# Altium PCB IPG_Rigid.PcbDoc (part 9 of 13)
Units mm, origin at the board's own origin, x right, y up, seen from the top; angles counter-clockwise.
Board outline 69.6 x 90.73 mm, 10 copper layers (TOP, DHOR, DVERT, GND 1, POWER, GND 2, GND 3, AVERT, AHOR, BOT), stack 1.198 mm thick; 745 components, 398 nets, 1997 pads, 2678 vias.
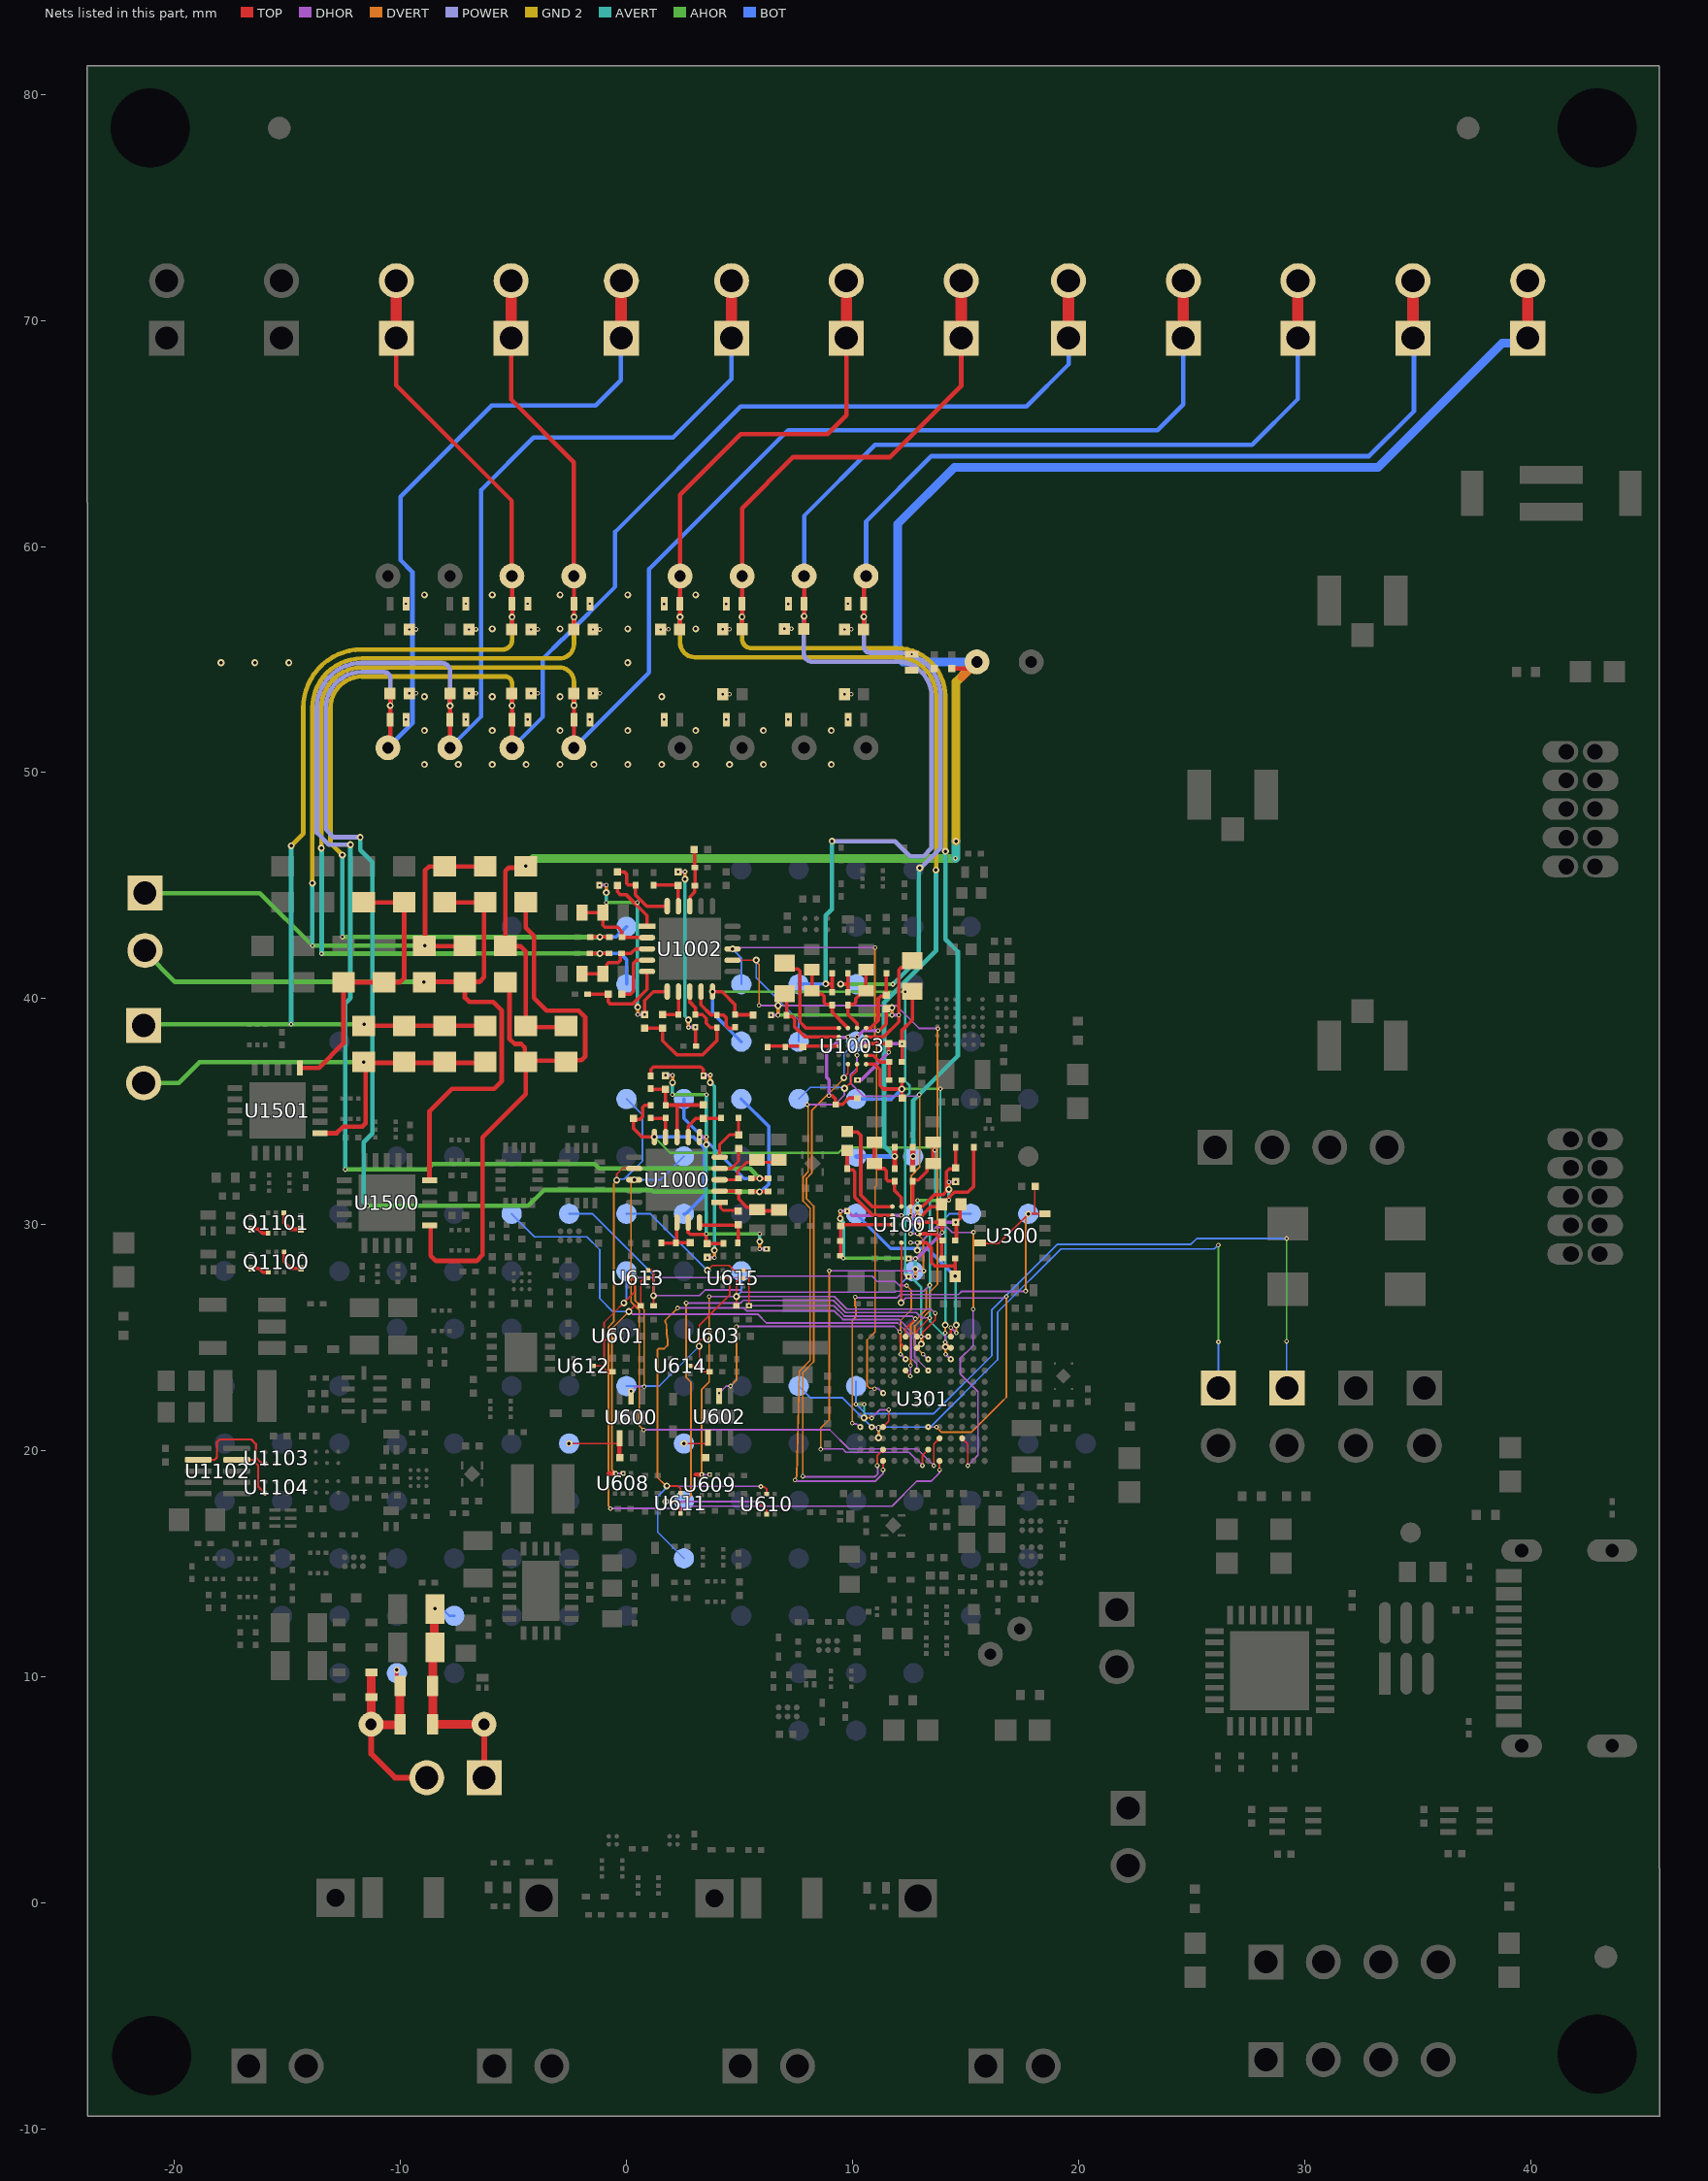
[diagram p13: the nets of this part, all layers, seen from the top]

## Via types
v1: diameter 0.203, hole 0.102, TOP to DHOR, tented top, 561 vias
v2: diameter 0.203, hole 0.102, DHOR to DVERT, tented top, 481 vias
v3: diameter 0.305/0.305/0.305/0.305/0.305/0.305 (per signal layer), hole 0.152, DVERT to AVERT, 397 vias
v4: diameter 0.305/0.305/0/0.305/0.305/0.305 (per signal layer), hole 0.152, DVERT to AVERT, tented top, 283 vias
v5: diameter 0.305/0.305/0.305/0.305/0/0.305/0.305/0.305/0.305/0.305 (per signal layer), hole 0.152, TOP to BOT, 259 vias
v6: diameter 0.305, hole 0.152, TOP to BOT, tented both sides, 169 vias
v7: diameter 0.305/0.305/0.305/0.305/0/0.305/0.305/0.305/0.305/0.305 (per signal layer), hole 0.152, TOP to BOT, tented both sides, 140 vias
v8: diameter 0.203, hole 0.102, AVERT to AHOR, tented top, 101 vias
v9: diameter 0.305/0.305/0.305/0.305/0.305/0.305 (per signal layer), hole 0.152, DVERT to AVERT, tented top, 79 vias
v10: diameter 0.305/0/0/0.305/0/0.305/0.305/0/0/0.305 (per signal layer), hole 0.152, TOP to BOT, tented both sides, 74 vias
v11: diameter 0.305/0.305/0.305/0.305/0.305/0.305/0.305/0.305/0.305/0.305 (per signal layer), hole 0.152, TOP to BOT, tented both sides, 66 vias
v12: diameter 0.203, hole 0.102, AHOR to BOT, tented both sides, 31 vias
v13: diameter 0.203, hole 0.102, DHOR to DVERT, tented both sides, 9 vias
v14: diameter 0.203/0.203 (per signal layer), hole 0.102, DHOR to DVERT, tented top, 7 vias
v15: diameter 0.203/0.203 (per signal layer), hole 0.102, TOP to DHOR, tented top, 7 vias
v16: diameter 0.203, hole 0.102, TOP to DHOR, tented both sides, 5 vias
v17: diameter 0.305, hole 0.152, DVERT to AVERT, tented both sides, 2 vias
v18: diameter 0.305/0.305/0/0.305/0.305/0.305 (per signal layer), hole 0.152, DVERT to AVERT, tented both sides, 2 vias
v19: diameter 0.305, hole 0.152, DVERT to AVERT, tented top, 2 vias
v20: diameter 0.305/0/0/0.305/0.305/0.305/0.305/0/0/0.305 (per signal layer), hole 0.152, TOP to BOT, tented both sides, 1 vias
v21: diameter 0.305/0.305/0/0.305/0.305/0.305 (per signal layer), hole 0.152, DVERT to AVERT, 1 vias
v22: diameter 0.203, hole 0.102, TOP to BOT, tented top, 1 vias

## Nets (pads, with @x,y where several pads share a name; then routed paths per layer and width w, separated by ;. In a path a pad name is that pad's centre, name@x,y a point inside that pad or via, vN(x,y) a via of type N, cw(c..) or ccw(c..) an arc to the next point about the centre after c; other vN are vias at no path point) (continued)
CH2_STIM_OR_SINK: C1511.2 C1512.2 C1513.2 C1520.2 U1501.6 | length 13
  TOP w0.2: U1501.6@-14.443,36.937 U1501.6@-14.402,36.937
  TOP w0.203: U1501.6@-14.402,36.937 -13.609,36.937 -12.522,38.024 C1513.2@-12.522,40.729 C1512.2@-10.731,40.729 -10.02,40.729 -9.836,40.913 C1520.2@-9.836,44.26 C1511.2@-11.627,44.26
CH3: C1204.2 C1508.1 C1509.1 C1510.1 C1519.1 D1205.2 J1206.1 J1226.1 J1226.2 JP1502.1 | length 58.8
  TOP w0.19: J1226.1@-10.185,69.222 -10.185,67.132 -5.072,62.018 J1206.1@-5.072,58.697 ; C1204.2@-5.064,56.336 J1206.1@-5.064,58.645
  TOP w0.203: C1508.1@-11.627,38.798 C1519.1@-6.254,38.798
  TOP w0.5: J1226.1@-10.185,69.222 J1226.2@-10.185,71.762
  GND 2 w0.2: v4(-14.834,46.761) -14.834,46.77 -14.3,47.304 -14.3,52.87 cw(c-11.721,52.87) -14.25,53.373 cw(c-11.721,52.87) -11.721,55.449 -5.474,55.449 ccw(c-5.474,55.859) -5.064,55.859 -5.064,56.336 v6(-5.064,56.886)
  AVERT w0.2: v8(-14.837,38.863) -14.837,46.74 v4@-14.824,46.752
  AHOR w0.2: JP1502.1@-21.361,38.811 -21.309,38.863 v8(-14.837,38.863) ; v8@-14.834,38.862 v7(-11.608,38.862)
CH3_STIM_OR_SINK: C1508.2 C1509.2 C1510.2 C1519.2 JP1502.2 U1501.1 | length 20.4
  TOP w0.203: U1501.1@-13.558,34.052 -12.822,34.052 -12.535,34.339 -11.683,34.339 -11.542,34.481 -11.542,37.113 C1508.2@-11.627,37.198 ; C1508.2@-11.589,37.16 -9.836,37.16 -8.045,37.16 -6.292,37.16 C1519.2@-6.254,37.198
  AHOR w0.2: JP1502.2@-21.361,36.271 -19.812,36.271 -18.893,37.19 v7(-11.629,37.19)
CH4: C1211.2 C1504.1 C1505.1 C1507.1 C1518.1 D1213.2 J1214.1 J1230.1 J1230.2 JP1501.1 | length 62.7
  TOP w0.19: J1230.1@-5.105,69.222 -5.105,66.512 -2.329,63.735 J1214.1@-2.329,58.697 ; C1211.2@-2.321,56.339 v6(-2.321,56.889) J1214.1@-2.321,58.645
  TOP w0.203: C1518.1@-7.149,42.329 C1505.1@-8.94,42.329 -8.915,42.354 -8.915,45.669 -8.738,45.847 -6.267,45.847 C1507.1@-6.254,45.86
  TOP w0.5: J1230.1@-5.105,69.222 J1230.2@-5.105,71.762
  GND 2 w0.2: v4@-13.9,45.11 -13.9,52.856 cw(c-11.707,52.856) -11.707,55.049 -2.971,55.049 ccw(c-2.971,55.699) -2.321,55.699 v6(-2.321,56.889)
  AVERT w0.2: v4(-13.898,45.112) -13.898,42.347 v8(-13.894,42.342)
  AHOR w0.2: JP1501.1@-21.307,44.671 -16.223,44.671 v8(-13.894,42.342) v7(-8.928,42.342)
CH4_STIM_OR_SINK: C1504.2 C1505.2 C1507.2 C1518.2 JP1501.2 U1500.15 | length 33.2
  TOP w0.203: C1505.2@-8.941,40.742 -6.502,40.742 -6.299,40.945 -6.299,44.214 C1507.2@-6.254,44.26 C1504.2@-8.045,44.26 ; C1505.2@-8.94,40.729 C1505.2@-8.94,40.741 ; U1500.15@-8.715,31.963 -8.715,35.024 -7.722,36.017 -5.86,36.017 -5.519,36.358 -5.519,39.468 -5.902,39.851 -6.958,39.851 -7.149,40.042 C1518.2@-7.149,40.729
  AHOR w0.2: JP1501.2@-21.296,42.066 -19.974,40.744 v7(-8.971,40.744)
CHG1.EN: R603.1 TP602.1 U301.J7 U608.2 U613.5 | length 32.8
  TOP w0.076: U608.2@-0.153,19 v1(-0.14,19) ; v7@0.102,26.162 0.356,26.416 R603.1@0.634,26.416 0.634,27.482 0.787,27.635 U613.5@0.958,27.635
  DVERT w0.076: v2(-0.47,18.999) -0.645,19.175 -0.645,25.41 -0.368,25.687 v7(0.104,26.159)
  DHOR w0.076: v2(-0.47,18.999) v1(-0.14,19) ; v7(0.104,26.159) 0.152,26.159 0.277,26.034 5.818,26.034 6.198,25.654 9.6,25.654 11.999,25.654 12.598,25.055 12.598,24.086 12.85,23.834 v1(12.85,23.55)
  BOT w0.076: TP602.1@-5.08,30.48 -4.066,29.466 -1.754,29.466 -1.184,28.895 -1.184,26.736 -0.607,26.159 v7(0.104,26.159)
CHG1.OVP_ERRn: R603.2 TP606.1 U301.J8 U613.6 | length 24.7
  TOP w0.076: U613.6@0.958,27.985 0.964,27.991 1.118,27.991 1.194,27.914 R603.2@1.194,26.416 ; U301.J8@12.35,23.55 12.35,23.508 v1(12.558,23.3)
  DVERT w0.076: v2(12.573,23.774) 12.573,25.559 12.814,25.8 13.271,26.257 13.271,27.164 13.416,27.308 v2(13.416,27.324)
  DHOR w0.076: v7(1.197,26.863) 3.234,26.863 3.483,27.112 5.03,27.112 5.124,27.018 11.875,27.018 11.92,27.064 13.155,27.064 v2(13.416,27.324) ; v1(12.558,23.3) 12.565,23.308 12.565,23.767 v2(12.573,23.774)
  BOT w0.076: TP606.1@-2.54,30.48 -1.499,30.48 1.197,27.784 v7(1.197,26.863)
CHG1.STATUS: U301.K8 U600.2 | length 21.5
  TOP w0.076: U301.K8@12.35,24.05 12.35,24.054 v1(12.352,24.057) U301.K8@12.355,24.059
  DVERT w0.076: v2@0.386,27.636 0.386,26.629 0.783,26.233 v2(0.783,22.836) ; v2@0.389,27.636 v2(0.414,27.661) ; v2(12.126,24.273) 12.126,25.758 12.598,26.231 12.598,27.102 v2(12.395,27.305)
  DHOR w0.076: v1(0.2,22.631) 0.404,22.836 v2(0.783,22.836) ; v2(0.414,27.661) 5.629,27.661 5.695,27.726 10.864,27.726 11.097,27.494 11.89,27.494 12.079,27.305 v2(12.395,27.305) ; v2@12.128,24.271 12.133,24.271 12.346,24.058 v1@12.352,24.058
CHG1_OVP_ERR: R601.2 TP607.1 U601.A1 U612.5 U613.2 | length 7.6
  TOP w0.076: U612.5@-1.455,23.749 -0.991,23.749 ; R601.2@-0.61,23.495 -0.838,23.495 -0.991,23.647 -0.991,23.749 ; U601.A1@-0.552,24.912 -0.564,24.9 -0.991,24.9 ; U613.2@0.058,27.635 0.229,27.635 0.356,27.508 0.356,27.021 -0.991,25.675 -0.991,24.9 ; -0.991,23.749 -0.991,24.9
  BOT w0.076: v7(-0.118,26.542) -0.118,26.583 0,26.701 TP607.1@0,27.94
CHG1_VCC: C600.1 TP600.1 U600.4 U608.3 | length 3.5
  TOP w0.076: v7(-2.54,20.32) -0.387,20.32 -0.315,20.392 -0.3,20.407 U600.4@-0.3,20.55
  TOP w0.203: -0.774,19 U608.3@-0.503,19 ; C600.1@-0.315,19.7 -0.315,20.392 U600.4@-0.315,20.55
CHG2.EN: R616.1 TP623.1 U301.L7 U609.2 U615.5 | length 23.2
  TOP w0.076: R616.1@4.861,26.408 4.861,27.474 5.014,27.627 U615.5@5.184,27.627 ; U301.L7@12.85,24.55 13.101,24.801 13.101,25.242 13.659,25.8 v1(13.659,26.086)
  DVERT w0.076: v2(3.327,18.948) 3.327,22.714 3.658,23.045 v2(3.658,26.822)
  DHOR w0.076: v2(3.327,18.948) 3.331,18.945 3.679,18.945 v1(3.683,18.941) ; v2(3.658,26.822) v2(3.658,26.822) 4.862,26.823 v7(4.863,26.824) 9.201,26.824 9.761,26.264 13.481,26.264 v1(13.659,26.086)
  BOT w0.076: v7(4.863,26.824) 5.08,27.041 TP623.1@5.08,27.94
CHG2.OVP_ERRn: R616.2 TP626.1 U301.M8 U615.6 | length 16.7
  TOP w0.076: v7(3.581,27.984) 3.797,28.2 4.529,28.2 4.745,27.984 U615.6@5.163,27.984 ; U615.6@5.19,27.983 5.344,27.983 5.421,27.906 R616.2@5.421,26.416 ; U301.M8@12.35,25.05 12.35,25.407 v1(12.785,25.842)
  DHOR w0.076: v1(5.42,26.412) 5.424,26.416 9.178,26.416 9.635,25.959 12.634,25.959 12.751,25.842 v1(12.785,25.842)
  BOT w0.076: TP626.1@0,30.48 1.068,30.48 3.564,27.984 v7(3.581,27.984)
CHG2.STATUS: U301.L8 U602.2 | length 11.5
  TOP w0.076: v1(12.092,25.256) 12.099,25.249 12.099,24.801 U301.L8@12.35,24.55
  DVERT w0.076: v2(4.6,22.861) 4.867,23.128 v2(4.867,25.491)
  DHOR w0.076: v1(4.1,22.552) 4.408,22.861 v2(4.6,22.861) ; v2(4.867,25.491) 4.877,25.502 11.847,25.502 v1(12.092,25.256)
CHG2_OVP_ERR: R612.2 TP627.1 U603.A1 U614.5 U615.2 | length 10.1
  TOP w0.076: U614.5@2.812,23.749 3.226,23.749 ; v7(3.216,24.622) 3.226,24.631 3.226,24.888 ; v7@3.226,24.655 3.226,23.749 ; U603.A1@3.681,24.912 3.251,24.912 3.226,24.888 ; R612.2@3.682,23.495 3.678,23.499 3.382,23.499 3.226,23.655 3.226,23.749 ; 4.363,27.634 4.497,27.634 4.566,27.565 4.566,26.892 3.226,25.552 3.226,24.888
  BOT w0.076: TP627.1@0,22.86 1.455,22.86 v7(3.216,24.622)
CHG2_VCC: C603.1 TP618.1 U602.4 U609.3 | length 1.6
  TOP w0.076: v7(2.54,20.32) U602.4@3.599,20.32 ; U602.4@3.599,20.357 3.599,20.465 3.6,20.466 U602.4@3.6,20.575
  TOP w0.203: 3.062,18.941 U609.3@3.333,18.941
  BOT w0.076: v7(2.54,20.32) TP618.1@2.565,20.345
CHG_RATE1: TP629.1 U301.J6 U610.5 U611.5 | length 30.8
  TOP w0.076: v7(1.785,18.442) 2.259,18.442 2.388,18.313 U611.5@2.388,18.128 ; v1(5.944,18.415) 5.948,18.41 6.092,18.41 6.204,18.298 6.204,18.095 U610.5@6.201,18.092 ; v1(13.35,23.55) U301.J6@13.352,23.55
  DVERT w0.076: 1.766,25.589 1.776,25.207 ; 1.766,25.59 1.715,25.706 1.715,25.769 1.738,25.791 v2(2.261,26.314) ; 1.777,25.206 1.777,25.181 1.827,24.896 1.827,24.675 1.671,24.519 1.416,24.519 1.372,24.474 1.372,18.819 1.748,18.442 v7(1.785,18.442)
  DHOR w0.076: v7(1.785,18.442) 1.799,18.429 5.93,18.429 v1(5.944,18.415) ; v2(2.261,26.314) 5.212,26.314 5.34,26.186 9.192,26.186 9.572,25.806 12.063,25.806 12.751,25.118 12.751,24.149 v1(13.35,23.55)
  BOT w0.076: v7(1.785,18.442) 1.785,18.387 1.38,17.982 1.38,16.4 TP629.1@2.54,15.24
CHG_RATE2: TP630.1 U301.M7 U610.2 U611.2 | length 28.7
  TOP w0.076: v7(1.732,17.752) 2.135,17.752 2.377,17.51 2.377,17.239 U611.2@2.388,17.228 ; v1(5.797,17.767) 6.201,17.363 U610.2@6.201,17.192 ; U301.M7@12.85,25.05 12.85,25.31 v1(13.415,25.875)
  DVERT w0.076: v7(1.732,17.752) 1.755,17.729 2.556,17.729 2.854,18.027 2.854,23.026 2.641,23.239 v2(2.641,26.538)
  DHOR w0.076: v7(1.732,17.752) 5.721,17.752 v1@5.734,17.739 ; v2(2.641,26.538) 5.059,26.538 5.17,26.649 9.16,26.649 9.698,26.111 12.821,26.111 13.057,25.875 v1(13.415,25.875)
  BOT w0.076: v7(1.732,17.752) 1.746,17.766 2.526,17.766 TP630.1@2.54,17.78
COIL_PAD_1: C500.1 C501.1 C502.2 C503.2 J500.1 J502.1 TP500.1 | length 10.8
  TOP w0.1: J500.1@-6.401,7.925 -6.376,7.9 J500.1@-6.3,7.9
  TOP w0.254: J502.1@-6.299,5.537 J500.1@-6.3,7.9
  TOP w0.381: C502.2@-8.575,9.6 -8.575,8.087 -8.611,8.052 -8.575,8.016 C503.2@-8.575,7.9 -6.426,7.9 J500.1@-6.401,7.925 ; C502.2@-8.564,9.611 -8.564,11.211 C500.1@-8.475,11.3 ; C500.1@-8.509,11.3 -8.509,12.984 v7(-8.475,13.018)
  BOT w0.1: v7(-8.475,13.018) -8.154,13.018 -7.836,12.7 TP500.1@-7.62,12.7
COIL_PAD_2: C502.1 C503.1 D501.2 D504.1 J501.1 J502.2 TP507.1 | length 10.1
  TOP w0.152: v7(-10.16,10.305) -10.16,9.735 C502.1@-10.025,9.6
  TOP w0.254: J501.1@-11.292,7.893 -11.292,6.593 -10.236,5.537 J502.2@-8.839,5.537
  TOP w0.381: J501.1@-11.3,7.9 -11.274,7.874 -10.051,7.874 C503.1@-10.025,7.9 C502.1@-10.025,9.6 ; J501.1@-11.292,7.91 D501.2@-11.292,10.042
DAC1_VOUTA: U1102.2 U1103.1 | length 4.5
  TOP w0.102: U1102.2@-18.95,19.6 -18.224,19.6 -18.121,19.703 -18.121,20.379 -18,20.5 -16.6,20.5 -16.4,20.3 -16.4,19.7 -16.2,19.5 -16.16,19.461 -16.011,19.461 U1103.1@-16,19.45
DAC1_VOUTB: U1102.9 U1104.1 | length 2.4
  TOP w0.102: U1102.9@-17.25,19.6 -16.551,19.6 -16.3,19.349 -16.3,18.424 -16.2,18.325 U1104.1@-16.023,18.147
DEBUG_UART_RX: JP1402.1 TP302.1 U301.D11 | length 31.7
  DVERT w0.102: v4(11.151,20.574) 11.153,20.576 11.153,20.953 v2(11.154,20.955)
  AVERT w0.102: v4(11.151,20.574) 11.154,20.578 11.154,21.045 v8(11.158,21.049)
  DHOR w0.102: v1(10.849,21.051) 10.869,21.031 11.075,21.031 11.152,20.955 v2(11.154,20.955)
  AHOR w0.076: v12(26.187,24.816) v12(26.186,29.104)
  AHOR w0.102: v12@10.85,21.05 v8(11.158,21.049)
  BOT w0.076: TP302.1@7.62,22.86 8.128,22.352 9.548,22.352 10.85,21.05 13.445,21.05 16.419,24.025 16.419,26.133 19.217,28.931 20.834,28.931 26.008,28.931 26.181,29.104 v12(26.186,29.104) ; JP1402.1@26.187,22.771 v12(26.187,24.816)
  other v12: 10.849,21.051
DEBUG_UART_TX: JP1400.1 TP303.1 U301.D10 | length 34.4
  TOP w0.076: U301.D10@11.35,21.05 11.601,21.301 v1(11.601,21.814)
  DVERT w0.076: v4(10.515,21.457) 10.521,21.451 10.842,21.451 v2(10.848,21.445)
  AVERT w0.076: v4(10.515,21.457) v8(10.516,22.052)
  DHOR w0.076: v2(10.848,21.445) 11.217,21.814 v1(11.601,21.814)
  AHOR w0.076: v12(10.153,22.052) v8(10.516,22.052) ; v12(29.21,24.841) v12(29.21,29.388)
  BOT w0.076: v12@10.15,22.05 10.156,22.056 10.156,23.084 TP303.1@10.16,23.087 ; v12@10.155,22.05 10.564,21.641 13.595,21.641 16.169,24.216 16.169,26.237 19.066,29.134 24.979,29.134 25.233,29.388 v12(29.21,29.388) ; v12(29.21,24.841) 29.21,22.788 JP1400.1@29.227,22.771
DEFIB_COMMON: D1200.1 D1201.1 D1202.1 D1203.1 D1204.1 D1205.1 D1206.1 D1207.1 D1208.1 D1209.1 D1210.1 D1211.1 D1212.1 D1213.1 D1214.1 D1215.1 D1216.1
  other v1: -9.756,52.343 -7.111,52.343 -4.367,52.343 -1.622,52.343 1.661,52.343 4.41,52.343 7.16,52.343 9.8,52.343 12.622,55.237 -9.756,57.471 -7.111,57.471 -4.367,57.471 -1.622,57.471 1.661,57.468 4.41,57.468 7.16,57.468 9.8,57.47
E1_1: Q1100.4 R1102.2 | length 0.8
  TOP w0.152: R1102.2@-16.595,28.076 -16.266,28.076 -16.093,27.902 Q1100.4@-15.849,27.902
E1_2: Q1100.1 R1103.1 | length 1.3
  TOP w0.152: Q1100.1@-15.149,28.802 -15.149,28.372 -14.849,28.072 R1103.1@-14.399,28.072
E2_1: Q1101.4 R1104.2 | length 0.8
  TOP w0.152: R1104.2@-16.605,29.8 -16.276,29.8 -16.102,29.626 Q1101.4@-15.858,29.626
E2_2: Q1101.1 R1105.1 | length 1.3
  TOP w0.152: Q1101.1@-15.158,30.526 -15.158,30.095 -14.859,29.796 R1105.1@-14.408,29.796
ECG.HR_LOD: TP1009.1 U301.C3 U1001.C1 | length 19.7
  TOP w0.076: U1001.C1@12.567,29.204 U1001.C1@12.59,29.204 ; U301.C3@14.85,20.55 15.1,20.3 15.1,19.343 v1(15.101,19.342)
  DVERT w0.076: v2@12.868,29.206 v8(12.874,29.2) 12.874,28.899 v4@12.879,28.894 ; v2(15.342,26.264) 15.346,26.268 15.346,29.664 v2(15.351,29.669)
  AVERT w0.076: v8(12.874,29.2) 12.877,29.197 12.877,28.897 v4@12.879,28.894
  DHOR w0.076: v12(12.565,29.202) 12.567,29.204 v2@12.866,29.204 ; v2(12.87,29.206) 12.879,29.215 13.013,29.215 13.686,29.888 14.182,29.888 14.413,29.658 v2@15.288,29.658 ; v1(15.101,19.342) 15.555,19.795 15.555,22.612 14.764,23.403 14.764,24.068 15.342,24.646 v2(15.342,26.264)
  AHOR w0.076: v12(12.565,29.202) v8@12.873,29.201
  BOT w0.076: v12(12.565,29.202) 13,29.202 14.278,30.48 TP1009.1@15.24,30.48
  other v1: 12.565,29.202
  other v4: 12.87,28.87
ECG.HR_OUT: C1012.1 R1029.2 TP1010.1 U301.M4 U1001.D1 | length 12.1
  TOP w0.102: U301.M4@14.35,25.05 v1@14.35,25.452
  TOP w0.152: U1001.D1@12.967,29.204 13.267,29.204 13.492,28.978 13.492,28.323 13.646,28.169 14.547,28.169 ; C1012.1@14.522,27.711 v7(14.534,27.724) 14.547,27.736 14.547,28.169 ; R1029.2@14.547,28.504 14.547,28.169 ; C1012.1@14.617,27.754 C1012.1@14.667,27.704
  DVERT w0.102: v2(14.599,25.216) v4@14.599,25.584
  AVERT w0.102: v7(14.534,27.724) 14.569,27.689 14.569,25.8 14.569,25.584 v4(14.594,25.559)
  DHOR w0.102: v1@14.35,25.446 v1(14.35,25.449) 14.357,25.449 14.59,25.216 v2(14.599,25.216)
  BOT w0.152: TP1010.1@10.16,30.48 11.692,28.948 13.31,28.948 v7(14.534,27.724)
ECG.HR_SDNn: TP1001.1 U301.D6 U1001.B1 | length 17.7
  TOP w0.076: v7(12.149,26.548) 12.167,26.566 U1001.B1@12.167,29.204
  DVERT w0.076: v2(13.715,21.045) 13.715,21.03 13.917,20.828 15.265,20.828 16.6,22.163 16.807,22.37 v2(16.807,26.827)
  DHOR w0.076: v7(12.149,26.548) 12.36,26.759 12.967,26.759 16.705,26.759 16.773,26.827 v2(16.807,26.827) ; v1(13.35,21.057) 13.358,21.051 13.709,21.051 v2(13.715,21.045)
  BOT w0.076: v7(12.149,26.548) 12.141,26.556 12.141,27.381 TP1001.1@12.7,27.94
ECG.RLD: TP1005.1 U301.B6 U1001.C2 U1003.C2 | length 33
  TOP w0.076: U1003.C2@10.16,37.5 v1(10.2,37.5) ; v1(13.092,19.344) 13.099,19.351 13.099,19.799 U301.B6@13.35,20.05 U301.B6@13.352,20.05 ; U1001.C2@12.567,29.604 12.595,29.604 U1001.C2@12.567,29.604
  DVERT w0.076: v2(8.6,20.066) 8.6,21.005 8.973,21.377 v2(8.973,27.965) ; v2(12.957,35.75) 12.975,35.732 12.975,32.547 12.605,32.177 12.605,30.202 v4(12.87,29.938) v2(12.87,29.602) 12.87,29.591 13.136,29.324 13.136,27.973 v2(13.156,27.954)
  DVERT w0.102: v2@12.868,29.602 v8(12.874,29.607) v4@12.874,29.908
  AVERT w0.102: v8(12.874,29.607) 12.877,29.61 12.877,29.911 v4@12.879,29.914
  DHOR w0.076: v2(8.6,20.066) 8.612,20.077 9.571,20.077 9.716,19.932 12.504,19.932 v1(13.092,19.344) ; v2(8.973,27.965) 8.978,27.96 13.15,27.96 v2(13.156,27.954) ; v1(10.2,37.5) 10.2,36.924 10.156,36.88 9.908,36.631 9.908,36.269 10.484,35.693 12.865,35.693 12.923,35.75 v2(12.957,35.75)
  DHOR w0.102: v12(12.565,29.606) 12.567,29.604 12.866,29.604 v2@12.868,29.602
  AHOR w0.102: v12(12.565,29.606) v8(12.874,29.607)
  BOT w0.076: v12(12.565,29.606) 12.7,29.741 TP1005.1@12.7,30.48
  other v1: 12.565,29.606
ECG.RR_LOD: TP1008.1 U301.A10 U1003.C1 | length 27.4
  TOP w0.076: v7(9.649,36.034) 9.661,36.034 9.844,36.216 9.898,36.216 9.952,36.271 9.952,36.564 10.2,36.812 U1003.C1@10.2,37.1 ; v1(11.35,19.151) U301.A10@11.35,19.55
  DVERT w0.076: v2(7.459,18.707) 7.531,18.863 7.651,23.524 8.128,24.001 8.128,30.73 7.816,31.043 7.816,32.113 8.041,32.339 8.041,35.273 8.022,35.292 v2(7.998,35.316)
  DHOR w0.076: v2(7.459,18.707) 7.493,18.707 7.544,18.656 11.02,18.656 11.35,18.986 v1(11.35,19.151) ; v2(7.998,35.316) 9.226,35.316 9.639,35.729 9.639,36.023 v7(9.649,36.034)
  BOT w0.076: TP1008.1@7.62,35.56 8.134,36.074 9.609,36.074 v7(9.649,36.034)
ECG.RR_OUT: C1026.1 R1060.2 TP1012.1 U301.L4 U1003.D1 | length 18.8
  TOP w0.102: v1(14.102,24.805) 14.102,24.801 14.35,24.553 U301.L4@14.35,24.55
  TOP w0.152: U1003.D1@10.6,37.1 10.975,37.1 11.21,36.865 11.21,36.164 11.371,36.003 v7(12.18,36.003) ; R1060.2@12.18,36.4 v7(12.18,36.003) ; C1026.1@12.2,35.6 12.18,35.62 v7(12.18,36.003)
  DVERT w0.102: v2(14.102,25.216) v4(14.102,25.559)
  AVERT w0.102: v8(13.891,36.01) 13.886,36.005 13.886,30.842 14.106,30.622 14.106,25.8 14.106,25.563 v4(14.102,25.559)
  DHOR w0.102: v1(14.102,24.805) v2@14.102,25.216
  AHOR w0.102: v7(12.18,36.003) 12.184,36.006 13.887,36.006 v8(13.891,36.01)
  BOT w0.152: TP1012.1@10.16,35.56 11.737,35.56 v7(12.18,36.003)
ECG.RR_SDNn: TP1004.1 U301.B10 U1003.B1 | length 25.7
  TOP w0.076: v7(9.623,36.498) 9.623,36.522 9.8,36.698 9.8,36.88 U1003.B1@9.8,37.1 ; v1(11.092,19.344) 11.099,19.351 11.099,19.799 U301.B10@11.35,20.05
  DVERT w0.076: v2(7.798,18.872) 7.803,18.878 7.803,23.461 8.28,23.938 8.28,30.827 7.968,31.14 7.968,32.05 8.194,32.276 8.194,35.043 9.623,36.472 v7(9.623,36.498)
  DHOR w0.076: v2(7.798,18.872) 7.82,18.85 9.6,18.85 10.998,18.85 11.117,18.969 11.117,19.236 ; v1(11.092,19.344) 11.116,19.32 11.116,19.237
  BOT w0.076: v7(9.623,36.498) 9.623,36.88 9.623,37.563 TP1004.1@10.16,38.1
ECG_HR+: C1202.2 D1202.2 J1202.1 J1220.1 J1220.2 R1012.1 R1020.1 TP1016.1 | length 58.6
  TOP w0.2: C1202.2@2.371,56.338 v6(2.371,56.888) J1202.1@2.371,58.697 2.371,62.29 5.055,64.973 8.89,64.973 9.728,65.811 J1220.1@9.728,69.222 ; R1012.1@11.867,32.529 v7(11.867,33.02) R1020.1@11.867,33.389
  TOP w0.5: J1220.1@9.728,69.222 J1220.2@9.728,71.762
  GND 2 w0.2: v6(2.371,56.888) 2.371,55.757 ccw(c3.022,55.757) 3.022,55.106 11.971,55.106 cw(c11.971,53.377) 13.7,53.377 13.7,45.697 v4(13.692,45.689)
  AVERT w0.2: v7(11.867,33.02) 11.396,33.491 11.396,39.813 13.692,42.11 v4(13.692,45.689)
  BOT w0.2: TP1016.1@10.16,33.02 v7(11.867,33.02)
ECG_HR-: C1205.2 D1206.2 J1207.1 J1224.1 J1224.2 R1018.1 R1019.1 TP1017.1 | length 55.6
  TOP w0.2: C1205.2@5.114,56.341 v6(5.114,56.891) J1207.1@5.114,58.697 5.114,61.691 7.38,63.957 11.664,63.957 14.808,67.101 J1224.1@14.808,69.222 ; R1018.1@12.667,32.529 R1019.1@12.667,33.379
  TOP w0.5: J1224.1@14.808,69.222 J1224.2@14.808,71.762
  GND 2 w0.2: v6(5.114,56.891) 5.114,55.923 ccw(c5.536,55.923) 5.536,55.501 7.1,55.501 7.579,55.506 cw(c7.581,55.315) 7.581,55.506 11.971,55.506 cw(c11.971,53.377) 14.1,53.377 14.1,46.527 v4(14.114,46.513)
  AVERT w0.2: v7(12.685,33.02) 12.685,35.494 14.661,37.47 14.661,37.668 14.661,42.078 14.114,42.625 v4(14.114,46.513)
ECG_HR_HPDRIVE: C1008.1 U1001.A5 | length 4.9
  TOP w0.152: C1008.1@9.767,34.104 10.219,34.104 10.367,33.956 10.367,31.304 10.867,30.804 U1001.A5@11.767,30.804
ECG_HR_HPSENSE: C1008.2 R1009.2 U1001.A4 | length 4.3
  TOP w0.152: R1009.2@9.767,32.484 9.815,32.434 10.006,32.434 10.095,32.345 10.095,31.215 10.906,30.404 11.467,30.404 U1001.A4@11.767,30.404 ; R1009.2@9.767,32.529 C1008.2@9.767,33.304
ECG_HR_IN+: D1002.2 D1006.1 R1012.2 U1001.B5 | length 3.6
  TOP w0.152: D1006.1@10.967,33.654 10.967,32.654 11.14,32.48 11.411,32.48 11.5,32.391 11.5,32.013 11.59,31.924 R1012.2@11.747,31.924 ; R1012.2@11.867,31.924 11.867,31.504 12.167,31.204 U1001.B5@12.167,30.804 U1001.B5@12.167,30.784
ECG_HR_IN-: D1003.2 D1007.1 R1018.2 U1001.C5 | length 3.4
  TOP w0.152: U1001.C5@12.567,30.804 12.567,30.818 12.667,30.918 R1018.2@12.667,31.924 ; R1018.2@12.667,31.93 12.715,31.979 12.914,31.979 13.294,32.358 13.294,32.53 13.417,32.654 13.567,32.654 D1003.2@13.567,32.704 D1007.1@13.567,33.59
ECG_HR_IOUT: R1004.1 R1023.1 U1001.B4 | length 9.2
  DVERT w0.152: v4(9.464,30.272) v2(9.464,30.603) ; v2(12.79,27.702) v4(12.79,28.033)
  AVERT w0.152: v4(9.464,30.272) 9.464,30.242 9.594,30.111 v8(9.594,28.523) ; v4(12.79,28.033) v8(12.79,28.504)
  DHOR w0.152: v2(9.464,30.603) 9.467,30.601 v1@9.767,30.601 ; v1(9.769,30.599) v1@9.767,30.601 ; v1(12.167,30.404) 9.964,30.404 v1@9.767,30.601 ; v1(12.485,27.706) 12.487,27.704 12.786,27.704 v2(12.79,27.702)
  AHOR w0.152: v8(9.594,28.523) 9.604,28.513 12.78,28.513 v8(12.79,28.504)
ECG_HR_OPAMP+: C1013.2 R1024.2 U1001.D3 | length 3.4
  TOP w0.152: U1001.D3@12.967,30.004 12.98,30.004 13.08,30.104 13.267,30.104 C1013.2@13.937,30.104 ; C1013.2@13.967,30.104 13.968,30.102 13.968,29.661 v1(13.97,29.66)
  DHOR w0.152: v1(12.487,28.504) 12.835,28.504 13.96,29.629 13.96,29.65 v1(13.97,29.66)
ECG_HR_OPAMP-: R1027.2 R1029.1 U1001.D2 | length 2.7
  TOP w0.152: U1001.D2@12.967,29.604 13.667,29.604 13.797,29.474 ; R1027.2@13.942,29.304 R1029.1@13.942,28.529 ; 13.797,29.474 R1027.2@13.954,29.316 ; 13.797,29.474 R1027.2@13.954,29.316 ; 13.797,29.474 R1027.2@13.954,29.316 ; 13.797,29.474 R1027.2@13.954,29.316 ; R1029.1@13.942,28.529 R1029.1@13.967,28.504 ; R1029.1@13.942,28.529 R1029.1@13.967,28.504 ; R1029.1@13.942,28.529 R1029.1@13.967,28.504
ECG_HR_REFIN: C1005.2 R1003.2 R1010.1 U1001.A3 | length 3.6
  TOP w0.152: R1003.2@9.449,28.626 9.469,28.646 C1005.2@9.469,29.947 9.527,30.004 U1001.A3@11.767,30.004
ECG_HR_REFOUT: C1002.1 C1013.1 R1027.1 U1001.C3 | length 3.8
  TOP w0.152: R1027.1@14.567,29.304 R1027.1@14.597,29.334 ; R1027.1@14.579,29.316 R1027.1@14.597,29.334 ; C1002.1@14.767,30.904 14.767,30.277 14.677,30.188 14.65,30.188 14.597,30.134 14.597,30.104 R1027.1@14.597,29.334
  DHOR w0.152: v1(12.567,30.004) 12.58,30.004 12.68,30.104 13.267,30.104 v1(14.567,30.104)
ECG_HR_RLD: C1010.1 R1022.2 U1001.D5 | length 3.7
  TOP w0.152: U1001.D5@12.967,30.804 12.976,30.814 13.11,30.814 13.267,30.97 13.62,31.324 14,31.324 14.153,31.476 14.153,32.336 14.286,32.469 14.483,32.469 14.567,32.553 14.567,32.604 R1022.2@14.567,33.379
ECG_HR_RLDFB: C1010.2 U1001.C4 | length 3.5
  DVERT w0.152: v2(12.872,30.4) v4(12.872,30.731) ; v4(14.262,31.562) v2(14.262,31.893)
  AVERT w0.152: v4(12.872,30.731) 12.875,30.734 12.875,31.071 v8(12.878,31.074) ; v8(14.262,31.09) v4(14.262,31.562)
  DHOR w0.152: v1(12.567,30.404) 12.569,30.402 12.868,30.402 v2@12.87,30.4 ; v2(14.262,31.893) 14.265,31.891 14.565,31.891 v1(14.567,31.889)
  AHOR w0.152: v8(12.878,31.074) 12.886,31.082 14.254,31.082 v8(14.262,31.09)
ECG_HR_SW: C1002.2 R1006.1 U1001.D4 | length 4.6
  TOP w0.152: U1001.D4@12.967,30.404 12.976,30.414 13.078,30.414 13.267,30.602 13.468,30.804 13.867,30.804 13.967,30.904 13.967,30.944 14.11,31.088 14.15,31.088 14.497,31.434 15.097,31.434 15.367,31.704 R1006.1@15.367,33.379
ECG_RR+: C1208.2 D1210.2 J1211.1 J1225.1 J1225.2 R1043.1 R1051.1 TP1019.1 | length 62.8
  TOP w0.152: v7(8.813,40.652) 8.816,40.65 9.05,40.65 ; R1043.1@9.1,40.325 R1051.1@9.1,41.075
  TOP w0.19: C1208.2@7.857,56.363 v6(7.857,56.918) J1211.1@7.857,58.697
  TOP w0.5: J1225.1@29.707,69.222 J1225.2@29.707,71.762
  POWER w0.2: v6@7.851,56.912 7.851,55.274 ccw(c8.219,55.274) 8.219,54.906 11.971,54.906 cw(c11.971,53.377) 13.5,53.377 13.5,46.656 13.141,46.297 12.547,46.297 11.879,46.965 v9(9.093,46.965)
  AVERT w0.2: v7(8.813,40.652) 8.813,43.669 9.093,43.948 v9(9.093,46.965)
  BOT w0.152: TP1019.1@7.62,40.64 7.626,40.646 8.807,40.646 v7(8.813,40.652)
  BOT w0.19: J1211.1@7.857,58.697 7.857,61.357 11,64.5 27.68,64.5 29.707,66.527 J1225.1@29.707,69.222
ECG_RR-: C1212.2 D1214.2 J1215.1 J1233.1 J1233.2 R1047.1 R1050.1 TP1021.1 | length 60.6
  TOP w0.152: v7(9.474,40.64) 9.503,40.669 9.531,40.641 9.782,40.641 ; R1047.1@9.8,40.325 R1050.1@9.8,41.12
  TOP w0.2: C1212.2@10.502,56.349 v6(10.502,56.899) D1214.2@10.502,57.472 10.502,58.599 cw(c10.6,58.599) J1215.1@10.6,58.697
  TOP w0.5: J1233.1@34.798,69.222 J1233.2@34.798,71.762
  POWER w0.2: 10.502,56.349 10.502,55.573 ccw(c10.77,55.573) 10.77,55.305 11.153,55.305 11.692,55.305 ; 10.502,56.361 v6@10.502,56.911 ; 11.694,55.306 11.692,55.305 ; v9(12.976,45.78) 13.005,45.78 13.057,45.832 13.067,45.832 13.9,46.665 13.9,53.377 ccw(c11.973,53.377) 11.973,55.305 11.692,55.305
  AVERT w0.2: v8(11.786,40.64) 12.929,41.783 12.929,42.521 12.93,42.522 12.93,42.794 12.929,42.795 v9@12.929,45.787 ; v9@12.956,45.76 v9(12.976,45.78)
  AHOR w0.191: v7(9.474,40.64) v8(11.786,40.64)
  BOT w0.152: v7(9.474,40.64) TP1021.1@10.16,40.64
  BOT w0.2: J1215.1@10.6,58.697 10.6,61.1 13.5,64 32.863,64 34.843,65.98 34.843,69.177 J1233.1@34.798,69.222
ECG_RR_HPDRIVE: C1023.1 U1003.A5 | length 4.9
  TOP w0.152: C1023.1@7,41.625 7.313,41.312 7.581,41.312 7.67,41.223 7.67,38.968 7.938,38.7 9.145,38.7 U1003.A5@9.4,38.7
ECG_RR_HPSENSE: C1023.2 R1040.1 U1003.A4 | length 3.8
  TOP w0.152: C1023.2@7,40.225 7.087,40.138 R1040.1@7.087,39.356 ; R1040.1@7.087,39.269 7.087,39.265 7.135,39.216 7.339,39.216 7.429,39.127 7.429,38.774 7.903,38.3 9.145,38.3 U1003.A4@9.4,38.3
ECG_RR_IN+: D1011.2 D1014.1 R1043.2 U1003.B5 | length 3.5
  TOP w0.152: D1014.1@8.2,41.28 D1011.2@8.2,40.35 8.358,40.192 8.661,40.192 8.75,40.103 8.75,39.837 8.839,39.748 9.072,39.748 R1043.2@9.1,39.72 9.1,39.4 U1003.B5@9.79,38.71
ECG_RR_IN-: D1010.2 D1015.1 R1047.2 U1003.C5 | length 3.2
  TOP w0.152: R1047.2@9.8,39.675 9.8,39.3 10.18,38.92 10.2,38.9 U1003.C5@10.2,38.7 ; R1047.2@9.8,39.72 9.832,39.752 10.057,39.752 10.146,39.841 10.146,39.995 D1010.2@10.326,40.175 ; D1010.2@10.326,40.176 10.5,40.35 D1010.2@10.6,40.35 D1015.1@10.6,41.28
ECG_RR_IOUT: R1035.2 R1054.1 U1003.B4 | length 4.8
  TOP w0.152: v1(8.966,35.712) 8.976,35.703 9.109,35.703 9.231,35.581 9.231,35.34 9.252,35.319 9.559,35.319 9.84,35.6 R1054.1@10.175,35.6
  DHOR w0.152: v1(8.966,35.712) 8.966,36.407 8.845,36.528 8.845,37.609 9.529,38.293 9.794,38.293 v1(9.804,38.303)
ECG_RR_OPAMP+: C1028.2 R1055.2 U1003.D3 | length 3.3
  TOP w0.152: U1003.D3@10.6,37.9 10.614,37.9 10.714,38 C1028.2@11.6,38 v1(11.6,37.617)
  DHOR w0.152: v1(10.22,36.4) 10.23,36.41 10.392,36.41 v1(11.6,37.617)
ECG_RR_OPAMP-: R1058.2 R1060.1 U1003.D2 | length 1.9
  TOP w0.152: U1003.D2@10.6,37.5 10.855,37.5 10.912,37.5 11.212,37.2 R1058.2@11.62,37.2 R1060.1@11.62,36.4
ECG_RR_REFIN: C1019.2 R1032.2 R1041.1 U1003.A3 | length 3.2
  TOP w0.152: R1032.2@6.239,37.9 7.027,37.9 7.8,37.9 U1003.A3@9.4,37.9
ECG_RR_REFOUT: C1017.2 C1028.1 R1058.1 U1003.C3 | length 5.3
  TOP w0.152: R1058.1@12.18,37.2 12.2,37.22 C1028.1@12.2,38 ; v1(12.19,38) 12.19,38.598 12.649,39.057 C1017.2@12.649,40.321
  DHOR w0.152: v1(10.2,37.9) 10.214,37.9 10.314,38 10.855,38 v1@12.177,38
ECG_RR_RLD: C1025.1 R1053.2 U1003.D5 | length 3
  TOP w0.152: U1003.D5@10.6,38.7 10.8,38.7 10.855,38.755 11.14,39.04 11.14,39.994 11.262,40.116 11.465,40.116 C1025.1@11.5,40.151 ; C1025.1@11.5,40.166 R1053.2@11.5,41.12
ECG_RR_RLDFB: C1025.2 U1003.C4 | length 2.2
  TOP w0.152: U1003.C4@10.2,38.3 10.18,38.3 10.183,38.303 v1(10.2,38.303) ; v1(11.125,38.583) 11.135,38.592 11.197,38.592 11.5,38.895 C1025.2@11.5,39.551
  DHOR w0.152: v1(10.2,38.303) 10.479,38.583 10.855,38.583 v1(11.125,38.583)
ECG_RR_SW: C1017.1 R1037.1 U1003.D4 | length 11.8
  TOP w0.152: U1003.D4@10.6,38.3 11.364,38.3 12.047,38.982 12.047,41.269 12.149,41.372 12.275,41.372 12.42,41.516 C1017.1@12.42,41.651
  DVERT w0.152: v2(6.705,39.259) v4(6.705,39.694) ; v2(11.746,39.275) v4(11.746,39.606)
  AVERT w0.152: v8(6.699,39.277) 6.699,39.299 6.7,39.301 6.7,39.689 v4(6.705,39.694) ; v8(11.746,39.269) 11.746,39.273 11.748,39.276 11.746,39.278 v4(11.746,39.606)
  DHOR w0.152: v1(6.396,39.28) 6.406,39.27 6.68,39.27 6.691,39.259 v2(6.705,39.259) ; v2@11.747,39.275 11.749,39.277 12.049,39.277 v1(12.051,39.279)
  AHOR w0.152: v8(6.699,39.277) 6.702,39.273 11.742,39.273 v8(11.746,39.269)
ENCL: C1200.2 C1201.1 C1202.1 C1203.1 C1204.1 C1205.1 C1206.1 C1207.1 C1208.1 C1209.1 C1210.1 C1211.1 C1212.1 C1213.1 C1214.1 C1215.2 C1502.2 C1503.2 C1506.2 C1517.1 D1200.2 J1200.1 J1203.1 J1203.2 | length 88.2
  TOP w0.2: C1215.2@14.393,54.608 15.505,54.608 J1200.1@15.505,54.897
  TOP w0.203: v7(-4.463,45.86) -4.526,45.796 -5.207,45.796 -5.358,45.645 C1506.2@-5.358,42.329 -5.345,42.316 -4.699,42.316 -4.463,42.08 C1503.2@-4.463,38.798 -4.4,38.735 -2.735,38.735 C1517.1@-2.672,38.798
  TOP w0.5: J1203.1@39.878,69.222 J1203.2@39.878,71.762
  DVERT w0.381: 14.828,54.22 15.441,54.833 J1200.1@15.505,54.897
  GND 2 w0.381: v4(14.579,46.967) 14.579,54.009 J1200.1@15.147,54.577
  AVERT w0.381: v8(14.554,46.203) 14.579,46.228 v4(14.579,46.967)
  DHOR w0.102: v1(-9.615,53.503) -9.613,53.505 -9.313,53.505 v2@-9.311,53.507 ; v1(-9.615,56.333) -9.613,56.335 -9.313,56.335 v2@-9.311,56.337 ; v1(-6.965,53.503) -6.963,53.505 -6.664,53.505 v2@-6.662,53.507 ; v1(-6.965,56.333) -6.963,56.335 -6.664,56.335 v2@-6.662,56.337 ; v1(-4.225,53.503) -4.223,53.505 -3.924,53.505 v2@-3.922,53.507 ; v1(-4.225,56.333) -4.223,56.335 -3.924,56.335 v2@-3.922,56.337 ; v1(-1.486,53.503) -1.484,53.505 -1.184,53.505 v2(-1.181,53.507) ; v1(-1.486,56.333) -1.484,56.335 -1.184,56.335 v2(-1.181,56.337) ; v1(1.503,56.335) 1.506,56.338 1.851,56.338 v2(1.854,56.34) ; v1(4.258,53.465) 4.259,53.467 4.559,53.467 v2(4.563,53.469) ; v1(4.258,56.344) 4.259,56.346 4.559,56.346 v2(4.563,56.348) ; v1(6.992,56.361) 6.994,56.363 7.294,56.363 v2@7.296,56.365 ; v1(9.64,53.465) 9.642,53.467 9.942,53.467 v2(9.945,53.469) ; v1(9.64,56.335) 9.642,56.337 9.942,56.337 v2(9.945,56.339)
  AHOR w0.381: v7(-4.463,45.86) -4.12,46.203 v8(14.554,46.203)
  BOT w0.381: J1200.1@15.505,54.897 12.223,54.897 12,55.12 12,61 14.5,63.5 33.249,63.5 38.755,69.006 39.662,69.006 J1203.1@39.878,69.222
  other v2: -9.31,53.507 -6.66,53.507 -3.92,53.507 -9.31,56.337 -6.66,56.337 -3.92,56.337 7.297,56.365
  other v6: -8.941,50.362 -7.441,50.362 -5.941,50.362 -4.441,50.362 -2.941,50.362 -1.441,50.362 0.059,50.362 1.559,50.362 3.059,50.362 4.559,50.362 6.059,50.362 9.059,50.362 -8.941,51.862 -5.941,51.862 -2.941,51.862 0.059,51.862 3.059,51.862 6.059,51.862 9.059,51.862 -8.941,53.362 -5.941,53.362 -2.941,53.362 1.559,53.362 -17.941,54.862 -16.441,54.862 -14.941,54.862 0.059,54.862 -5.941,56.362 -2.941,56.362 0.059,56.362 3.059,56.362 -8.941,57.862 -5.941,57.862 -2.941,57.862 0.059,57.862 3.059,57.862
ENCL_STIM_OR_SINK: C1502.1 C1503.1 C1506.1 C1517.2 U1500.11 | length 28.7
  TOP w0.203: U1500.11@-8.715,29.963 -8.69,29.963 -8.661,29.934 -8.661,28.626 -8.433,28.397 -6.636,28.397 -6.37,28.663 -6.37,33.864 -4.463,35.771 C1503.1@-4.463,37.198 -4.382,37.279 -4.498,37.395 -4.498,37.834 -4.662,37.998 -4.956,37.998 -5.178,38.22 -5.178,40.549 C1506.1@-5.358,40.729 ; C1502.1@-4.463,44.26 -4.463,43.147 -4.089,42.774 -4.089,40.03 -3.531,39.472 -2.108,39.472 -1.829,39.192 -1.829,37.44 -1.986,37.282 -2.588,37.282 C1517.2@-2.672,37.198 -2.736,37.262 C1503.1@-4.318,37.262
ENG1+: C1203.2 D1203.2 J1204.1 J1219.1 J1219.2 R1011.1 R1017.1 TP1014.1 | length 82.5
  TOP w0.152: R1011.1@5.618,31.454 R1017.1@6.127,31.454
  TOP w0.2: J1204.1@-10.552,51.057 ccw(c-10.552,51.155) -10.453,51.155 -10.453,52.282 C1203.2@-10.453,53.515
  TOP w0.5: J1219.1@-0.241,69.209 J1219.2@-0.241,71.749
  POWER w0.2: -13.3,52.864 -13.3,47.488 -12.954,47.142 v19(-11.786,47.142) ; -13.3,52.865 cw(c-11.716,52.865) -13.216,53.373 cw(c-11.716,52.865) -11.716,54.449 -10.721,54.449 cw(c-10.721,54.181) -10.453,54.181 -10.453,53.515 v6(-10.453,52.965)
  AVERT w0.2: v19(-11.786,47.142) -11.786,46.584 -11.236,46.034 -11.236,34.045 -11.624,33.657 -11.624,31 v8(-11.461,30.837)
  AHOR w0.2: v8(-11.461,30.837) -7.861,30.837 -7.858,30.834 -4.347,30.834 -3.645,31.537 1.108,31.537 1.191,31.454 v7(5.884,31.454)
  BOT w0.152: TP1014.1@5.08,35.56 6.292,34.348 6.292,31.791 6.135,31.634 6.104,31.634 5.925,31.454 v7(5.884,31.454)
  BOT w0.2: J1204.1@-10.558,51.097 -9.474,52.181 -9.474,58.877 -10,59.403 -10,62.212 -5.969,66.243 -1.372,66.243 -0.254,67.361 -0.254,69.197 J1219.1@-0.229,69.222
ENG1-: C1206.2 D1207.2 J1208.1 J1223.1 J1223.2 R1015.1 R1016.1 TP1015.1 | length 87
  TOP w0.152: R1015.1@5.521,32.047 v7(5.9,32.047) ; v7(5.9,32.047) R1016.1@6.267,32.046
  TOP w0.19: J1208.1@-7.809,51.057 -7.809,51.097 C1206.2@-7.809,53.391
  TOP w0.5: J1223.1@4.648,69.222 J1223.2@4.648,71.762
  POWER w0.2: v19(-12.217,46.811) -13.171,46.811 -13.7,47.339 -13.7,52.856 cw(c-11.707,52.856) -11.707,54.849 -8.173,54.849 cw(c-8.173,54.483) -7.807,54.483 v6(-7.807,52.957)
  AVERT w0.2: v8(-12.448,32.442) -12.448,33.215 -12.447,33.217 -12.447,39.798 -12.217,40.027 v19(-12.217,46.811)
  AHOR w0.2: v8(-12.448,32.442) -8.825,32.442 -8.579,32.688 -1.404,32.688 -1.21,32.494 5.453,32.494 v7(5.9,32.047)
  BOT w0.152: TP1015.1@2.54,35.56 2.54,34.708 5.201,32.047 v7(5.9,32.047)
  BOT w0.19: J1208.1@-7.815,51.097 -6.426,52.486 -6.426,62.509 -4.115,64.821 2.057,64.821 4.648,67.412 J1223.1@4.648,69.222
ENG1.LOD: TP1006.1 U301.A5 U1000.12 | length 36.2
  TOP w0.076: v7(-0.432,31.972) -0.432,32.24 -0.174,32.498 0.342,32.498 U1000.12@0.342,32.487 ; v1(13.85,19.151) U301.A5@13.85,19.55
  DVERT w0.076: v2(-0.712,17.439) -0.712,17.461 -0.798,17.547 -0.798,25.473 -0.564,25.707 -0.564,31.813 -0.432,31.945 v7(-0.432,31.972)
  DHOR w0.076: v2(-0.712,17.439) -0.704,17.446 2.65,17.446 2.756,17.551 11.751,17.551 12.856,18.656 13.487,18.656 13.631,18.8 13.839,19.009 13.839,19.14 v1(13.85,19.151)
  BOT w0.076: v7(-0.432,31.972) -0.432,32.033 -0.415,32.016 -0.096,32.016 0.711,32.823 0.711,34.849 TP1006.1@0,35.56
ENG1.OUT: C1011.2 R1030.1 TP1011.1 U301.K4 U1000.10 | length 31.1
  TOP w0.152: R1030.1@1.077,35.28 0.81,35.28 0.721,35.19 0.721,34.777 0.604,34.66 0.301,34.66 0.301,34.273 0.697,33.877 v7(1.232,33.877)
  DVERT w0.102: v4@14.119,24.583 14.121,24.581 14.121,24.271 v2@14.128,24.264
  AVERT w0.102: v8(13.64,33.299) 13.658,33.281 13.658,31.362 13.429,31.132 13.429,25.8 13.429,25.726 14.114,25.041 v4(14.114,24.598)
  DHOR w0.102: v2@14.125,24.264 14.13,24.264 14.344,24.051 v1@14.349,24.051
  AHOR w0.102: v7(1.232,33.877) 1.937,33.172 9.366,33.172 9.61,33.416 13.523,33.416 v8(13.64,33.299)
  BOT w0.152: v7(1.232,33.877) 2.97,33.877 3.454,33.392 3.454,31.317 2.617,30.48 TP1011.1@2.54,30.48
  other v1: 14.35,24.05
  other v2: 14.123,24.266
ENG1.SDNn: TP1000.1 U301.C5 U1000.13 | length 28.8
  TOP w0.076: v1(13.599,19.342) v1(13.599,19.342) 13.6,20.3 U301.C5@13.85,20.55
  DVERT w0.076: v7(0.342,31.987) 0.342,31.971 0.198,31.828 0.198,26.583 0.567,26.213 0.567,21.12 v2(0.762,20.925)
  DHOR w0.076: v2(0.762,20.925) 0.767,20.93 8.992,20.93 9.837,20.084 12.856,20.084 v1(13.599,19.342)
  BOT w0.076: v7(0.342,31.987) 1.507,31.987 TP1000.1@2.54,33.02
ENG1_HPDRIVE: C1007.1 U1000.1 | length 1.1
  TOP w0.127: U1000.1@4.123,30.987 4.123,30.97 4.163,30.93 4.163,30.748 4.271,30.64 C1007.1@4.955,30.64
ENG1_HPSENSE: C1007.2 R1007.1 U1000.20 | length 2.6
  TOP w0.152: U1000.20@3.232,30.096 3.349,29.98 4.955,29.98 4.942,29.966 4.942,29.205 R1007.1@4.928,29.191
ENG1_IN+: D1000.2 D1004.1 R1011.2 U1000.2 | length 3.1
  TOP w0.152: U1000.2@4.123,31.487 R1011.2@5.009,31.487 ; R1011.2@4.96,31.464 4.96,31.14 5.321,30.78 5.61,30.78 5.777,30.613 D1004.1@6.674,30.613
ENG1_IN-: D1001.2 D1005.1 R1015.2 U1000.3 | length 3.1
  TOP w0.127: U1000.3@4.123,31.987 4.856,31.987 4.915,32.046 4.915,32.36 5.323,32.768 5.775,32.768 5.782,32.761 D1005.1@6.754,32.761
ENG1_IOUT: C1000.2 R1002.2 U1000.19 | length 2.4
  TOP w0.152: U1000.19@2.732,30.096 2.725,30.088 2.725,29.655 2.814,29.566 3.447,29.566 3.536,29.476 3.536,29.206 C1000.2@3.581,29.161 R1002.2@4.289,29.161
ENG1_OPAMP+: C1014.2 R1026.2 U1000.7 | length 2.1
  TOP w0.152: U1000.7@2.732,33.877 2.732,34.366 3.066,34.7 4.16,34.7 R1026.2@4.18,34.72
ENG1_OPAMP-: R1028.2 R1030.2 U1000.9 | length 1.6
  TOP w0.102: U1000.9@1.727,33.877 U1000.9@1.732,33.877
  TOP w0.152: R1030.2@1.077,34.72 1.1,34.696 1.749,34.696 1.772,34.72 1.727,34.674 U1000.9@1.727,33.877
ENG1_REFIN: C1003.2 R1000.2 R1008.1 U1000.18 | length 2.3
  TOP w0.152: R1000.2@1.549,29.191 R1008.1@2.184,29.191 2.216,29.222 2.216,30.156 2.222,30.162 2.232,30.151 U1000.18@2.232,30.096 ; R1008.1@2.191,29.197 C1003.2@2.818,29.197
ENG1_REFOUT: C1001.2 C1014.1 R1001.1 R1028.1 U1000.8 | length 4.5
  TOP w0.152: R1001.1@1.077,36.025 1.102,35.999 C1001.2@1.733,35.999 1.733,35.294 2.232,35.294 ; U1000.8@2.232,33.877 2.232,35.294 ; C1014.1@3.398,35.294 2.232,35.294
ENG1_RLD: C1009.1 R1021.2 U1000.5 | length 2.2
  TOP w0.127: U1000.5@4.123,32.987 4.123,33.545 4.558,33.98 C1009.1@4.96,33.98 ; R1021.2@4.952,34.669 4.952,34.018 C1009.1@4.96,34.01
ENG1_RLDFB: C1009.2 U1000.4 | length 1.5
  TOP w0.127: U1000.4@4.123,32.487 4.645,32.487 4.96,32.802 C1009.2@4.96,33.35
ENG1_SW: C1001.1 R1005.1 U1000.6 | length 12.9
  DVERT w0.152: v4(2.038,36.287) v2(2.038,36.618) ; v4(3.537,33.55) v2(3.537,33.881) ; v2(5.893,28.927) v4(5.893,29.257)
  AVERT w0.152: v8(2.033,35.756) 2.035,35.758 2.035,36.285 v4(2.038,36.287) ; v8(3.531,29.591) 3.534,29.594 3.534,33.547 v4(3.537,33.55) 3.537,33.591 3.566,33.62 3.538,33.62 v8@3.538,35.754 ; v4(5.893,29.257) v8(5.893,29.591)
  DHOR w0.152: v1(1.733,36.614) 1.735,36.616 2.034,36.616 v2(2.038,36.618) ; v1(3.232,33.877) 3.234,33.879 3.534,33.879 v2@3.536,33.881 ; v2@5.895,28.927 5.897,28.929 6.196,28.929 v1(6.198,28.931)
  AHOR w0.152: v8@2.033,35.755 v8(3.539,35.755) ; v8(3.531,29.591) v8(5.893,29.591)
ENG1_VO1: C1000.1 R1001.2 R1025.1 | length 11.7
  TOP w0.152: R1001.2@1.077,36.585 1.08,36.588 1.08,36.869 1.194,36.982 3.279,36.982 3.396,36.865 3.396,36.592 R1025.1@3.404,36.585
  DVERT w0.152: v4(3.709,36.293) v2(3.709,36.624) ; v2(3.886,28.542) v4(3.886,28.872)
  AVERT w0.152: v4(3.709,36.293) 3.886,36.115 v4(3.886,28.872)
  DHOR w0.152: v1(3.404,36.62) 3.406,36.622 3.705,36.622 v2(3.709,36.624) ; v1(3.581,28.546) 3.583,28.544 3.883,28.544 v2(3.886,28.542)
ENG2+: C1209.2 D1211.2 J1212.1 J1221.1 J1221.2 R1042.1 R1049.1 TP1018.1 | length 74.7
  TOP w0.152: R1049.1@-1.582,42.723 v7(-1.18,42.723) R1042.1@-0.778,42.723
  TOP w0.19: J1212.1@-5.064,51.045 v6(-5.064,52.963) C1209.2@-5.064,53.513
  TOP w0.5: J1221.1@19.558,69.222 J1221.2@19.558,71.762
  GND 2 w0.2: v4(-12.573,46.355) -13.1,46.882 -13.1,52.856 cw(c-11.702,52.856) -13.001,53.373 cw(c-11.702,52.856) -11.702,54.254 -5.375,54.254 cw(c-5.375,53.943) -5.064,53.943 v6@-5.064,52.963
  AVERT w0.2: v4(-12.573,46.355) -12.573,44.519 -12.567,44.513 v8(-12.567,42.726)
  AHOR w0.2: v8(-12.567,42.726) -6.898,42.726 -6.895,42.723 v7(-1.18,42.723)
  BOT w0.152: v7(-1.18,42.723) -0.457,42.723 TP1018.1@0,43.18
  BOT w0.19: J1212.1@-5.072,51.097 -3.699,52.47 -3.699,55.049 -2.85,55.898 -2.828,55.898 -0.5,58.227 -0.5,60.651 5.052,66.203 17.703,66.203 19.558,68.058 J1221.1@19.558,69.222
ENG2-: C1213.2 D1215.2 J1216.1 J1229.1 J1229.2 R1046.1 R1048.1 TP1020.1 | length 83.8
  TOP w0.152: R1048.1@-1.575,42 v7(-1.18,42) R1046.1@-0.825,42
  TOP w0.19: J1216.1@-2.321,51.045 v6(-2.321,52.973) C1213.2@-2.321,53.523
  TOP w0.5: J1229.1@24.638,69.222 J1229.2@24.638,71.762
  GND 2 w0.2: v4(-13.5,46.66) -13.5,52.856 cw(c-11.707,52.856) -11.707,54.649 -2.967,54.649 cw(c-2.967,54.003) -2.321,54.003 v6(-2.321,52.973)
  AVERT w0.2: v8(-13.489,41.989) v4@-13.489,46.649
  AHOR w0.2: v8(-13.489,41.989) -7.362,41.989 -7.354,41.997 -1.228,41.997 -1.225,42 v7(-1.18,42)
  BOT w0.152: v7(-1.18,42) -0.268,42 0,41.732 TP1020.1@0,40.64
  BOT w0.19: J1216.1@-2.329,51.097 1,54.426 1,59 7.151,65.151 23.5,65.151 24.638,66.289 J1229.1@24.638,69.222
ENG2.LOD: TP1007.1 U301.K6 U1002.12 | length 31.1
  TOP w0.076: U1002.12@4.691,41.7 4.694,41.703 5.737,41.703 v7(5.74,41.707)
  DVERT w0.076: v7(5.74,41.707) 5.74,41.645 5.872,41.513 v2(5.872,39.707) ; v2(13.123,24.266) 12.751,24.639 12.751,25.521 13.029,25.8 13.423,26.194 13.423,27.027 13.759,27.363 13.759,37.668 13.759,38.647 v2(13.783,38.671)
  DHOR w0.076: v2(5.872,39.707) 5.885,39.694 11.941,39.694 12.949,38.686 13.767,38.686 v2(13.783,38.671) ; v2@13.125,24.264 13.13,24.264 13.344,24.051 v1(13.35,24.05)
  BOT w0.076: v7(5.74,41.707) 5.74,40.932 7.62,39.052 TP1007.1@7.62,38.1
ENG2.OUT: C1027.2 R1061.1 TP1013.1 U301.M6 U1002.10 | length 30.4
  TOP w0.152: v7(3.8,40.309) 4.23,40.309 4.8,39.74 R1061.1@4.8,39.3 4.813,39.287 5.583,39.287 C1027.2@5.6,39.27
  DVERT w0.102: v4(13.045,24.723) v2(13.045,25.054)
  AVERT w0.102: v8(12.331,40.308) 12.331,36.353 12.531,36.153 12.531,35.832 12.325,35.626 12.325,31.074 12.325,28.935 12.325,27.942 13.045,27.222 13.045,25.8 v4(13.045,24.723)
  DHOR w0.102: v2@13.046,25.054 13.048,25.052 13.348,25.052 v1(13.35,25.05) ; v1@13.35,25.044 v1@13.35,25.047
  AHOR w0.102: v7(3.8,40.309) v8@12.33,40.309
  BOT w0.152: v7(3.8,40.309) 3.8,39.38 TP1013.1@5.08,38.1
ENG2.SDNn: TP1003.1 U301.G10 U1002.13 | length 28.5
  TOP w0.076: U301.G10@11.35,22.55 U301.G10@11.357,22.55
  DVERT w0.076: v2(10.983,22.749) 10.963,22.768 10.767,22.768 10.676,22.859 10.646,22.889 10.646,24.902 10.999,25.255 10.999,31.668 11.062,31.731 11.062,38.144 10.995,38.211 v2(10.995,42.26)
  DHOR w0.076: v7(4.691,42.2) 4.734,42.244 4.847,42.244 4.864,42.26 v2(10.995,42.26) ; v2(10.983,22.749) 11.154,22.749 v1@11.357,22.545
  BOT w0.076: v7(4.691,42.2) 5.08,41.811 TP1003.1@5.08,40.64
  other v1: 11.358,22.546
ENG2_HPDRIVE: C1022.1 U1002.1 | length 2.5
  TOP w0.152: C1022.1@-0.4,44.97 -0.4,44.723 -0.269,44.592 0,44.592 0.909,43.683 U1002.1@0.909,43.2
ENG2_HPSENSE: C1022.2 R1038.1 U1002.20 | length 3.3
  TOP w0.152: C1022.2@-0.4,45.6 -0.089,45.6 0,45.511 0,45.109 0.089,45.02 R1038.1@0.4,45.02 0.4,44.592 0.902,44.091 U1002.20@1.8,44.091
ENG2_IN+: D1008.2 D1012.1 R1042.2 U1002.2 | length 3.8
  TOP w0.152: D1012.1@-1.961,43.8 D1008.2@-1.05,43.8 -1.05,43.244 -0.961,43.155 -0.379,43.155 -0.2,42.975 -0.2,42.757 -0.183,42.74 R1042.2@-0.2,42.723 -0.188,42.711 0.898,42.711 U1002.2@0.909,42.7
ENG2_IN-: D1009.2 D1013.1 R1046.2 U1002.3 | length 3.6
  TOP w0.152: D1013.1@-1.961,41.163 -1.897,41.1 D1009.2@-1.05,41.1 -0.876,41.274 -0.876,41.513 -0.787,41.602 -0.364,41.602 -0.275,41.692 -0.275,41.951 -0.226,42 0.192,42 0.392,42.2 U1002.3@0.909,42.2
ENG2_IOUT: C1015.2 R1034.2 U1002.19 | length 2
  TOP w0.152: R1034.2@1.2,45.02 C1015.2@2.286,45.02 ; C1015.2@2.286,45.014 2.286,44.105 U1002.19@2.3,44.091
ENG2_OPAMP+: C1029.2 R1057.2 U1002.7 | length 1.7
  TOP w0.152: C1029.2@1.6,39.33 1.63,39.3 R1057.2@2.3,39.3 ; R1057.2@2.3,39.346 U1002.7@2.3,40.309
ENG2_OPAMP-: R1059.2 R1061.2 U1002.9 | length 2.7
  TOP w0.152: U1002.9@3.3,40.309 3.3,39.72 3.736,39.285 3.995,39.285 R1059.2@4,39.28 4.292,39.28 4.4,39.172 4.4,38.817 4.518,38.698 4.751,38.698 4.775,38.675 R1061.2@4.8,38.675
ENG2_REFIN: C1018.1 R1031.1 R1039.2 U1002.18 | length 2.6
  TOP w0.152: U1002.18@2.8,44.091 2.817,44.107 2.817,44.512 3.02,44.715 R1031.1@3.02,45 ; C1018.1@3,46.6 3.02,46.58 R1039.2@3.02,45.8 ; R1039.2@3.026,45.8 3.026,45.001 R1031.1@3.027,45
ENG2_REFOUT: C1016.2 C1029.1 R1033.1 R1059.1 U1002.8 | length 7.3
  TOP w0.152: C1016.2@0.8,38.7 C1029.1@1.6,38.7 ; C1029.1@1.6,38.67 1.6,38.143 2.229,37.515 3.369,37.515 4,38.145 R1059.1@4,38.72 3.723,38.72 3.531,38.913 3.531,39.127 3.363,39.294 R1033.1@3.048,39.294 3.048,39.601 2.806,39.842 2.806,40.303 U1002.8@2.8,40.309
ENG2_RLD: C1024.1 R1052.2 U1002.5 | length 3.9
  TOP w0.152: R1052.2@-1.675,40.2 C1024.1@-0.9,40.2 ; C1024.1@-0.8,40.2 -0.8,39.849 -0.711,39.76 0.26,39.76 0.909,40.409 U1002.5@0.909,41.2
ENG2_RLDFB: C1024.2 U1002.4 | length 2.4
  TOP w0.152: C1024.2@-0.2,40.2 0.175,40.2 0.312,40.337 0.312,41.564 0.448,41.7 U1002.4@0.909,41.7
ENG2_SW: C1016.1 R1036.1 U1002.6 | length 9.5
  TOP w0.152: C1016.1@0.8,39.33 0.8,39.916 1.193,40.309 U1002.6@1.8,40.309
  DVERT w0.152: v4(-0.895,44.693) v2(-0.895,45.024) ; v2(0.495,39.296) v4(0.495,39.627)
  AVERT w0.152: v8(-0.895,44.25) v4(-0.895,44.693) ; v8(0.475,44.25) 0.485,44.24 0.485,39.637 v4(0.495,39.627)
  DHOR w0.152: v1(-1.2,45.02) -1.198,45.022 -0.898,45.022 v2@-0.896,45.024 ; v2@0.496,39.296 0.498,39.298 0.798,39.298 v1(0.8,39.3)
  AHOR w0.152: v8(-0.895,44.25) v8(0.475,44.25)
ENG2_VO1: C1015.1 R1033.2 R1056.1 | length 8.4
  TOP w0.152: C1015.1@2.286,45.637 C1015.1@2.286,45.644 ; v1(3.048,38.734) 3.048,37.932 R1056.1@3.08,37.9
  DVERT w0.152: v4(2.591,45.287) v2(2.591,45.618) ; v2(2.743,38.73) v4(2.743,39.061)
  AVERT w0.152: v4(2.591,45.287) 2.591,39.227 2.743,39.075 v4(2.743,39.061)
  DHOR w0.152: v1(2.286,45.614) 2.288,45.616 2.588,45.616 v2(2.591,45.618) ; v2@2.744,38.73 2.746,38.732 3.046,38.732 v1(3.048,38.734)
FRAM_EN: C304.2 TP304.1 U300.3 U300.8 U301.D12 | length 21.7
  TOP w0.076: v1(10.34,21.05) U301.D12@10.35,21.05 ; U300.3@15.89,29.177 16.477,29.177 v7(17.78,30.48) ; v7@17.78,30.482 18.059,30.482 ; C304.2@18.059,31.79 18.059,30.482 ; U300.8@18.522,30.487 18.517,30.482 18.059,30.482
  DVERT w0.076: v2(9.987,21.214) 9.987,25.774 10.155,25.941 10.155,26.348 10.109,26.394 10.109,26.794 v2(10.117,26.802) ; v2(17.662,27.066) 17.662,30.321 17.78,30.439 v7(17.78,30.48)
  DHOR w0.076: v2(9.987,21.214) 10.012,21.19 10.175,21.19 10.315,21.05 v1(10.34,21.05) ; v2(10.117,26.802) 10.142,26.778 10.205,26.778 10.211,26.772 11.969,26.772 12.109,26.911 13.03,26.911 14.683,26.911 14.815,27.043 17.64,27.043 v2(17.662,27.066)